# Altium PCB 20bit_40MS_ADC_DIOT.PcbDoc (part 7 of 8)
Units mm, origin at the board's own origin, x right, y up, seen from the top; angles counter-clockwise.
Board outline 222.63 x 100.1 mm, 6 copper layers (L1, L2, L3, L4, L5, L6), stack 2.522 mm thick; 616 components, 374 nets, 2097 pads, 984 vias.
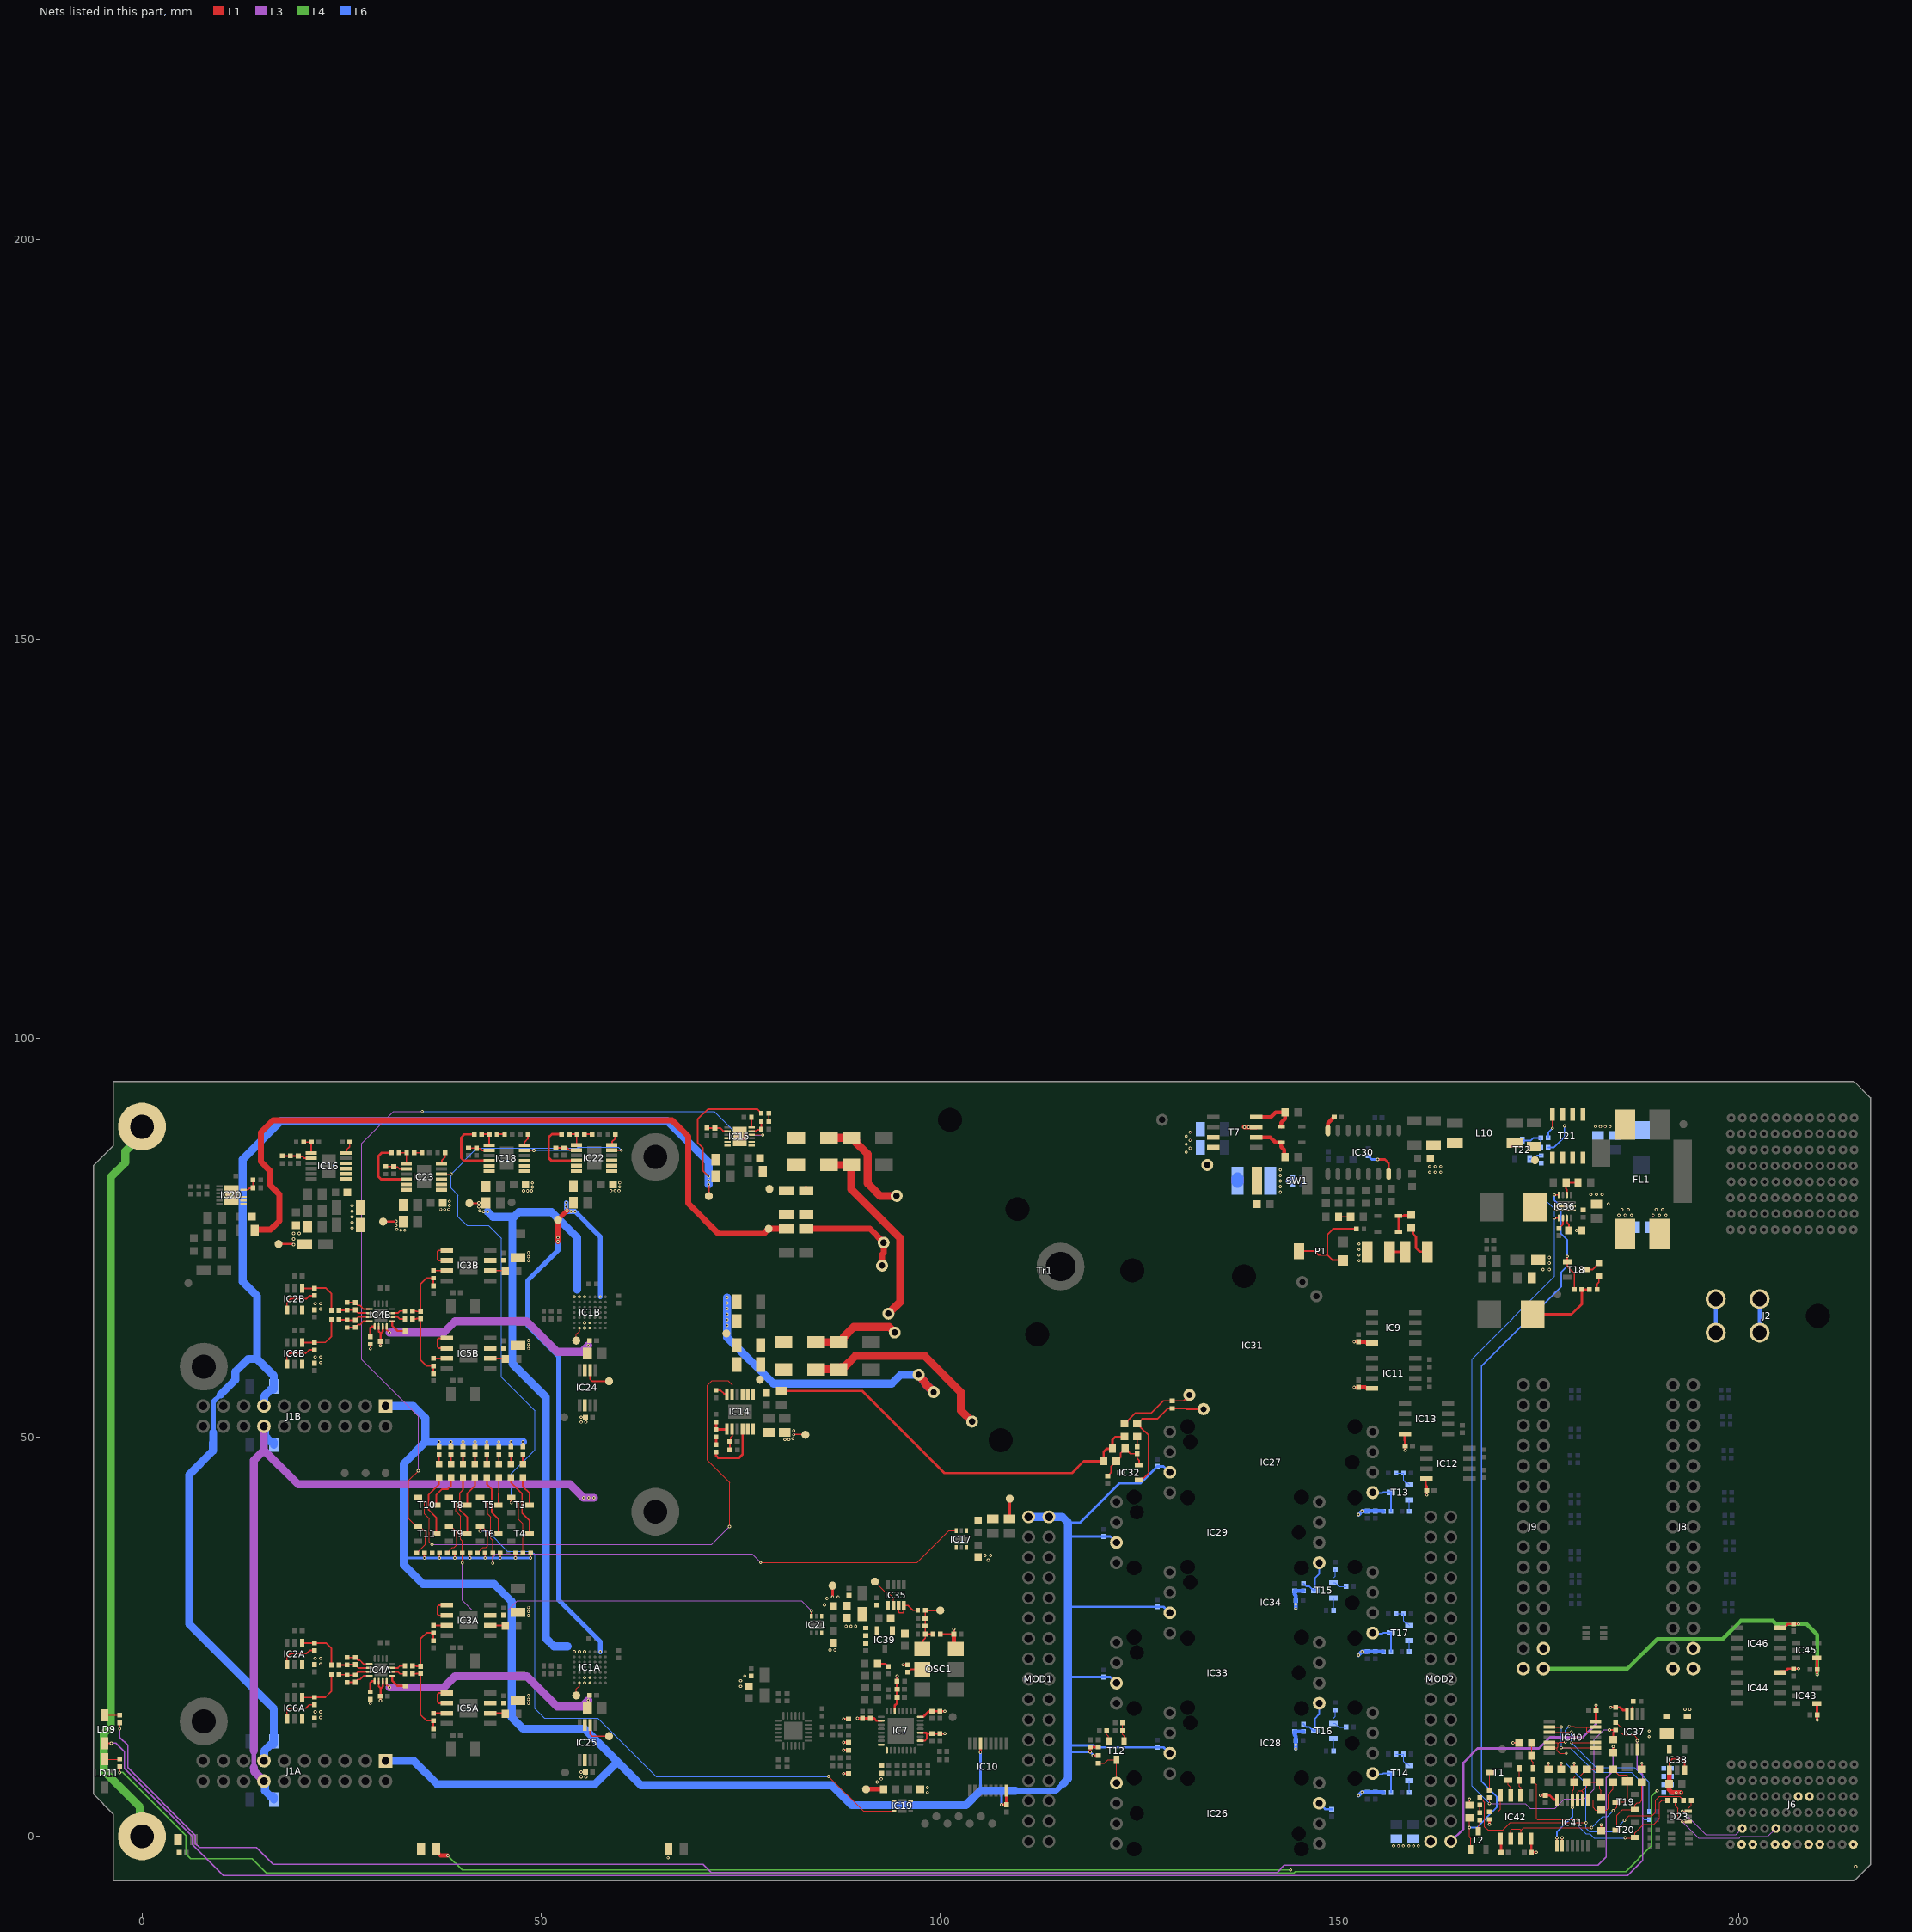
[diagram p9: the nets of this part, all layers, seen from the top]

## Via types
v1: diameter 0.4, hole 0.2, L1 to L6, tented both sides, 984 vias

## Nets (pads, with @x,y where several pads share a name; then routed paths per layer and width w, separated by ;. In a path a pad name is that pad's centre, name@x,y a point inside that pad or via, vN(x,y) a via of type N, cw(c..) or ccw(c..) an arc to the next point about the centre after c; other vN are vias at no path point) (continued)
N6V0: B17.1 C92.2 C93.2 C94.1 C95.1 C102.2 C103.2 IC20.1 IC20.2 IC20.3 IC20.13 Tr1.8 Tr1.9 | length 106.6
  L1 w0.75: C102.2@14.1,75.925 14.175,76 16.1,76 17.2,77.1 17.2,80.4 16.05,81.55 16.05,83.35 14.9,84.5 14.9,88.2 16.4,89.7 66.4,89.7 68.4,87.7 68.4,79.3 72.2,75.5 77.9,75.5 B17.1@78.5,76.1 C94.1@80.7,76.1 ; C95.1@83.2,76.1 91.178,76.1 Tr1.8@92.909,74.369 92.9,74.361 92.9,73.1 92.708,72.908 Tr1.9@92.708,71.494
  L1 w1: C94.1@80.625,76.175 C94.1@80.7,76.1
N15V0: B18.1 C68.2 C69.2 C184A.1 C184B.1 IC15.10 IC15.11 IC15.12 J1A.13 J1B.13 R197.2 | length 176
  L1 w0.2: v1(70.968,81.675) 71,81.643 B18.1@71,80.2 ; v1(70.968,82.675) 70.284,83.359 70.284,86.238 69.6,86.922 69.6,89.8 70.9,91.1 77.053,91.1 77.368,90.785 77.388,90.785 77.578,90.595 R197.2@77.578,90.575
  L6 w0.64: 8.922,50.588 8.922,54.434 9.666,55.178 9.678,55.178 9.858,55.358
  L6 w1: 8.922,50.588 8.922,49.322 8.9,49.3 8.9,48.3 5.9,45.3 5.9,26.6 16.5,16 C184A.1@16.5,11.9 16.5,11.575 16.425,11.5 16.1,11.5 15.327,10.727 15.327,9.513 J1A.13@15.272,9.458 ; 9.858,55.358 11.7,57.2 11.7,58.2 13.3,59.8 14.4,59.8 ; J1B.13@15.272,53.908 15.327,53.963 15.327,55.177 16.1,55.95 16.425,55.95 16.5,56.025 C184B.1@16.5,56.35 16.5,57.7 14.4,59.8 ; v1(70.968,81.675) v1(70.968,82.175) v1(70.968,82.675) 70.968,84.432 65.8,89.6 17.4,89.6 12.6,84.8 12.6,69.5 14.4,67.7 14.4,59.8
N15V0_LNA_ILIM: IC15.6 R34.2 | length 1.3
  L1 w0.2: R34.2@76.338,90.075 76.368,90.045 IC15.6@76.368,88.8
N15V0_LNA_PG: IC15.4 R70.1 T11.1 | length 110.9
  L1 w0.125: R70.1@34.43,35.5 34.43,35.52 34.657,35.748 34.677,35.748 35.5,36.57 35.5,38.1 35.013,38.588 34.812,38.588 T11.1@34.55,38.85 34.35,38.85 33.4,39.8 33.4,44.6 v1(34.6,45.8) ; IC15.4@76.368,87.9 77.718,87.9 v1(77.768,87.85)
  L3 w0.125: v1(34.6,45.8) 34.6,52.6 27.5,59.7 27.5,86.8 31.5,90.8 v1(35.1,90.8)
  L6 w0.125: v1(35.1,90.8) 71.7,90.8 74.65,87.85 v1(77.768,87.85)
N15V0_LNA_SET: C70.2 IC15.8 R35.2 | length 2.8
  L1 w0.2: R35.2@70.768,88.745 70.788,88.725 C70.2@71.768,88.725 72.418,88.725 72.793,88.35 IC15.8@73.368,88.35
N18V0: B16.1 C66.2 C67.2 C92.1 C93.1 D13.2 D14.2 IC15.1 IC15.2 IC15.13 | length 0.1
  L1 w1: C66.2@77.768,83.275 77.768,83.32 C66.2@77.793,83.345 ; C93.1@83.168,80.932 C93.1@83.2,80.9
NetB1A_1: B1A.1 IC1A.G2 | length 1.7
  L1 w0.125: B1A.1@54.4,17.65 54.4,18.45 54.8,18.85 IC1A.G2@54.8,19.225
NetB1B_1: B1B.1 IC1B.G2 | length 1.7
  L1 w0.125: B1B.1@54.4,62.1 54.4,62.9 54.8,63.3 IC1B.G2@54.8,63.675
NetB5_1: B5.1 C82.2 C154.2 OSC1.1 R123.1 R125.2 R126.2 | length 7.9
  L1 w0.2: OSC1.1@97.75,23.465 97.848,23.563 97.848,24.548 98.12,24.82 R126.2@98.12,25.325 ; R123.1@99.08,25.325 R126.2@98.12,25.325 ; B5.1@100,28.3 98.145,28.3 R125.2@98.12,28.325 R126.2@98.12,25.325
NetB15_1: B15.1 C167.2 L10.1 T21.5 T21.6 T21.7 T21.8
NetC9A_1: C9A.1 IC4A.2 R7A.2 R10A.1 | length 4
  L1 w0.2: R7A.2@24.67,21.45 25.67,21.45 R10A.1@25.7,21.48 25.72,21.5 C9A.1@26.7,21.5 27.1,21.1 IC4A.2@28.475,21.1
NetC9A_2: C9A.2 IC4A.1 R10A.2 | length 3.1
  L1 w0.2: R10A.2@25.7,22.42 25.72,22.4 C9A.2@26.7,22.4 27.05,22.05 27.3,22.05 27.75,21.6 IC4A.1@28.475,21.6
NetC9B_1: C9B.1 IC4B.2 R7B.2 R10B.1 | length 4
  L1 w0.2: R7B.2@24.67,65.9 25.67,65.9 R10B.1@25.7,65.93 25.72,65.95 C9B.1@26.7,65.95 27.1,65.55 IC4B.2@28.475,65.55
NetC9B_2: C9B.2 IC4B.1 R10B.2 | length 3.1
  L1 w0.2: R10B.2@25.7,66.87 25.72,66.85 C9B.2@26.7,66.85 27.05,66.5 27.3,66.5 27.75,66.05 IC4B.1@28.475,66.05
NetC11A_2: C11A.2 C15A.2 R9A.1 R12A.2 | length 7.4
  L1 w0.2: R12A.2@33.87,21.35 34.3,21.35 34.35,21.3 C15A.2@34.9,21.3 34.9,24.75 35.63,25.48 36.471,25.48 C11A.2@36.471,24.5
NetC11B_2: C11B.2 C15B.2 R9B.1 R12B.2 | length 7.4
  L1 w0.2: R12B.2@33.87,65.8 34.3,65.8 34.35,65.75 C15B.2@34.9,65.75 34.9,69.2 35.63,69.93 36.471,69.93 C11B.2@36.471,68.95
NetC15A_1: C15A.1 C22A.2 R13A.2 R17A.1 | length 9.1
  L1 w0.2: R13A.2@33.87,20.35 34.3,20.35 34.35,20.4 C15A.1@34.9,20.4 34.9,15.21 35.63,14.48 36.471,14.48 C22A.2@36.471,13.5
NetC15B_1: C15B.1 C22B.2 R13B.2 R17B.1 | length 9.1
  L1 w0.2: R13B.2@33.87,64.8 34.3,64.8 34.35,64.85 C15B.1@34.9,64.85 34.9,59.66 35.63,58.93 36.471,58.93 C22B.2@36.471,57.95
NetC19A_2: C19A.2 IC4A.9 | length 2.6
  L1 w0.25: IC4A.9@31.325,20.1 31.325,19.525 32,18.85 C19A.2@33.05,18.85
NetC19B_2: C19B.2 IC4B.9 | length 2.6
  L1 w0.25: IC4B.9@31.325,64.55 31.325,63.975 32,63.3 C19B.2@33.05,63.3
NetC20A_1: C20A.1 IC4A.3 R15A.2 R18A.1 | length 4
  L1 w0.2: R15A.2@24.67,20.25 25.67,20.25 R18A.1@25.7,20.22 25.72,20.2 C20A.1@26.7,20.2 27.1,20.6 IC4A.3@28.475,20.6
NetC20A_2: C20A.2 IC4A.4 R18A.2 | length 3.1
  L1 w0.2: R18A.2@25.7,19.28 25.72,19.3 C20A.2@26.7,19.3 27.05,19.65 27.3,19.65 27.75,20.1 IC4A.4@28.475,20.1
NetC20B_1: C20B.1 IC4B.3 R15B.2 R18B.1 | length 4
  L1 w0.2: R15B.2@24.67,64.7 25.67,64.7 R18B.1@25.7,64.67 25.72,64.65 C20B.1@26.7,64.65 27.1,65.05 IC4B.3@28.475,65.05
NetC20B_2: C20B.2 IC4B.4 R18B.2 | length 3.1
  L1 w0.2: R18B.2@25.7,63.73 25.72,63.75 C20B.2@26.7,63.75 27.05,64.1 27.3,64.1 27.75,64.55 IC4B.4@28.475,64.55
NetC47_2: C47.2 R22.1 | length 1.4
  L1 w0.2: R22.1@92.15,21.625 93.1,21.625 C47.2@93.45,21.275
NetC132_2: C132.2 IC30.16 | length 2
  L1 w0.5: IC30.16@148.555,88.425 148.57,88.44 148.57,89.32 C132.2@149.35,90.1
NetC137_1: C137.1 R104.1 R105.2 SW1.2 T7.3 | length 1.5
  L1 w0.6: v1(138.105,88.835) T7.3@139.6,88.835
  other v1: 142.6,80.7 142.6,81.4 142.6,82.1 142.6,82.8 142.6,83.5 138.653,88.835
NetC137_2: C137.2 C140.2 Tr1.2 | length 0.4
  L6 w1.5: C137.2@137.25,82 C137.2@137.25,82.1 C137.2@137.25,82.427
  other v1: 152.45,72.1 152.45,72.8 152.45,73.5 152.45,74.2
NetC138_1: C138.1 R110.2 | length 1.5
  L1 w0.2: R110.2@149.9,77.6 C138.1@151.4,77.6
NetC139_1: C139.1 R109.1 | length 4.4
  L1 w0.3: R109.1@159,76.2 159.224,75.976 159.224,75.476 159.6,75.1 159.6,73.7 160.051,73.249 160.951,73.249 C139.1@161,73.2
NetC139_2: C139.2 C140.1 | length 1.9
  L1 w0.3: C140.1@156.3,73.2 C139.2@158.2,73.2
NetC145_1: C145.1 C146.1 IC32.2 R116.1 R118.2 | length 7.6
  L1 w0.2: R118.2@120.968,45.145 120.988,45.145 121.178,45.335 121.178,45.355 121.4,45.577 121.4,46.307 121.668,46.575 121.693,46.575 122.068,46.95 C146.1@122.068,46.975 ; C146.1@122.068,47 122.443,47.375 122.468,47.375 122.6,47.507 122.6,48.007 122.768,48.175 122.818,48.175 R116.1@123.168,48.525 ; R116.1@123.168,48.575 R116.1@123.168,48.525 ; IC32.2@124.918,46.525 124.918,47.082 124.668,47.332 C145.1@124.668,47.925 123.818,47.925 123.568,48.175 123.518,48.175 R116.1@123.168,48.525
NetC145_2: C145.2 R117.1 | length 1.3
  L1 w0.2: C145.2@124.668,48.825 R117.1@124.668,50.075
NetC166_2: C166.2 IC36.9 | length 1.5
  L1 w0.2: C166.2@177.5,76.15 178,76.65 IC36.9@178,77.45
NetC172_1: C172.1 FL1.3 J2.1 J2.2 | length 4.6
  L6 w0.5: J2.2@202.645,63.089 J2.1@202.645,67.721
  other v1: 189.3,77.8 190.1,77.8 190.9,77.8 189.7,78.5 190.5,78.5
NetC172_2: C172.2 FL1.1 J2.3 J2.4 | length 4.4
  L6 w0.5: J2.4@197.145,63.089 J2.3@197.145,67.289 J2.3@197.27,67.415
  other v1: 185,77.8 185.8,77.8 186.6,77.8 185.4,78.5 186.2,78.5
NetC179_2: C179.2 IC42.6 IC42.7 R183.2 T19.3 | length 23.9
  L1 w0.125: IC42.6@171.465,-0.3 171.465,0.765 171.6,0.9 172.6,0.9 172.735,0.765 ; IC42.7@172.735,-0.3 172.735,0.765 ; v1(181.6,1.1) 173.07,1.1 172.735,0.765 ; v1(184.3,3.2) 184.75,3.65 T19.3@184.75,4.3 185.7,4.3 186.1,4.7 C179.2@186.1,6.9 186.1,7.6 186,7.7 185,7.7 184.737,7.963 184.737,8.013 184.35,8.4 R183.2@184.3,8.4
  L6 w0.125: v1(181.6,1.1) 183,2.5 183.6,2.5 v1(184.3,3.2)
NetC181_2: C181.2 IC42.5 | length 1.7
  L1 w0.3: IC42.5@170.195,-0.3 170.25,-0.355 C181.2@170.25,-2
NetC182_2: C182.2 D26.1 R185.2 | length 3.3
  L1 w0.125: R185.2@174.1,11.7 C182.2@174.1,10.1 174.1,9.4 174.25,9.25 D26.1@174.25,8.5
NetD1_2: D1.2 R100.2 T7.2 | length 5.4
  L1 w0.5: T7.2@139.6,87.565 141.335,87.565 142,86.9 D1.2@142.7,86.9 142.7,86.4 143.095,86.005 143.095,85.205 R100.2@143.2,85.1
NetD2_2: D2.2 D5.1 Tr1.3 | length 11.1
  L1 w1: D2.2@84.45,61.9 D5.1@87.25,61.9 87.575,61.9 87.85,62.175 87.85,62.5 89.15,63.8 93.6,63.8 Tr1.3@94.291,63.109
NetD3_2: D3.2 D6.1 Tr1.6 | length 25
  L1 w1: D3.2@84.45,58.5 D6.1@87.25,58.5 87.525,58.775 87.975,58.775 89.4,60.2 98,60.2 102.6,55.6 102.6,53.342 Tr1.6@103.991,51.951
NetD4_2: D4.2 R103.2 T7.4 | length 5.9
  L1 w0.5: T7.4@139.6,90.105 141.405,90.105 142,90.7 R103.2@143.2,90.7 143.2,89.9 142.7,89.4 D4.2@142.7,88.9
NetD7_2: D7.2 D8.1 R109.2 | length 3.6
  L1 w0.3: D8.1@157.4,75.7 D7.2@157.4,77.7 158,77.7 158.1,77.8 R109.2@159,77.8
NetD13_1: D13.1 D15.2 Tr1.7 | length 14.5
  L1 w1: D13.1@86.65,87.225 86.375,87.5 D13.1@86.05,87.5 D15.2@88.85,87.5 89.175,87.5 89.45,87.225 89.45,86.9 90.9,85.45 90.9,81.8 92.478,80.222 Tr1.7@94.532,80.222
NetD14_1: D14.1 D16.2 Tr1.10 | length 24.6
  L1 w1: D14.1@86.05,84.1 D16.2@88.85,84.1 88.85,81.05 95,74.9 95,66.973 Tr1.10@93.5,65.473
NetD23_4: D23.4 J6.H2 R133.2 | length 16.9
  L1 w0.125: R133.2@192.07,4.5 192.07,3.83 192.4,3.5 192.4,2.4 v1(192.95,1.85) D23.4@193.8,1.85
  L3 w0.125: v1(192.95,1.85) 195,-0.2 200.1,-0.2 200.3,0 203.695,0 J6.H2@204.683,0.988
NetD23_6: D23.6 J6.K2 R138.2 | length 11.3
  L1 w0.125: v1(192.95,3.15) D23.6@193.7,3.15 193.7,3.5 194.07,3.87 R138.2@194.07,4.5
  L3 w0.125: v1(192.95,3.15) 195.9,0.2 199.695,0.2 J6.K2@200.483,0.988
NetD25_2: D25.2 D26.2 IC42.2 | length 3.5
  L1 w0.125: D26.2@172.55,8.5 D25.2@172.55,7 172.55,6.25 172.735,6.065 IC42.2@172.735,5.1
NetIC2A_1: IC2A.1 R7A.1 R11A.2 | length 6
  L1 w0.2: IC2A.1@20.05,24.2 21.58,24.2 R11A.2@21.6,24.22 23.03,24.22 23.73,23.52 R7A.1@23.73,21.45
NetIC2A_4: IC2A.4 R11A.1 | length 4.8
  L1 w0.2: IC2A.4@18.15,21.5 18.15,22.451 18.586,22.887 20.586,22.887 20.979,23.28 R11A.1@21.649,23.28
NetIC2B_1: IC2B.1 R7B.1 R11B.2 | length 6
  L1 w0.2: IC2B.1@20.05,68.65 21.58,68.65 R11B.2@21.6,68.67 23.03,68.67 23.73,67.97 R7B.1@23.73,65.9
NetIC2B_4: IC2B.4 R11B.1 | length 4.8
  L1 w0.2: IC2B.4@18.15,65.95 18.15,66.901 18.586,67.337 20.586,67.337 20.979,67.73 R11B.1@21.649,67.73
NetIC3A_1: IC3A.1 IC3A.2 | length 3.5
  L1 w0.2: IC3A.2@38.2,27.685 37.173,27.685 37,27.858 37,28.782 37.173,28.955 IC3A.1@38.2,28.955
NetIC3A_3: IC3A.3 R9A.2 | length 1.7
  L1 w0.2: R9A.2@36.471,26.428 36.484,26.415 IC3A.3@38.2,26.415
NetIC3A_6: IC3A.6 R8A.1 | length 1.9
  L1 w0.2: IC3A.6@43.6,26.415 45.414,26.415 R8A.1@45.471,26.358
NetIC3B_1: IC3B.1 IC3B.2 | length 3.5
  L1 w0.2: IC3B.2@38.2,72.135 37.173,72.135 37,72.308 37,73.232 37.173,73.405 IC3B.1@38.2,73.405
NetIC3B_3: IC3B.3 R9B.2 | length 1.7
  L1 w0.2: R9B.2@36.471,70.878 36.484,70.865 IC3B.3@38.2,70.865
NetIC3B_6: IC3B.6 R8B.1 | length 1.9
  L1 w0.2: IC3B.6@43.6,70.865 45.414,70.865 R8B.1@45.471,70.808
NetIC4A_5: IC4A.5 R14A.1 | length 1.7
  L1 w0.25: R14A.1@28.6,18.12 28.6,19.25 28.775,19.425 IC4A.5@29.05,19.425
NetIC4A_10: IC4A.10 R13A.1 | length 1.8
  L1 w0.2: IC4A.10@31.325,20.6 32.05,20.6 32.3,20.35 R13A.1@33.03,20.35
NetIC4A_11: IC4A.11 R12A.1 | length 1.8
  L1 w0.2: IC4A.11@31.325,21.1 32.05,21.1 32.3,21.35 R12A.1@33.03,21.35
NetIC4B_5: IC4B.5 R14B.1 | length 1.7
  L1 w0.25: R14B.1@28.6,62.57 28.6,63.7 28.775,63.875 IC4B.5@29.05,63.875
NetIC4B_10: IC4B.10 R13B.1 | length 1.8
  L1 w0.2: IC4B.10@31.325,65.05 32.05,65.05 32.3,64.8 R13B.1@33.03,64.8
NetIC4B_11: IC4B.11 R12B.1 | length 1.8
  L1 w0.2: IC4B.11@31.325,65.55 32.05,65.55 32.3,65.8 R12B.1@33.03,65.8
NetIC5A_1: IC5A.1 IC5A.2 | length 3.5
  L1 w0.2: IC5A.2@38.2,16.685 37.173,16.685 37,16.858 37,17.782 37.173,17.955 IC5A.1@38.2,17.955
NetIC5A_3: IC5A.3 R17A.2 | length 1.7
  L1 w0.2: R17A.2@36.471,15.428 36.484,15.415 IC5A.3@38.2,15.415
NetIC5A_6: IC5A.6 R16A.1 | length 1.9
  L1 w0.2: IC5A.6@43.6,15.415 45.414,15.415 R16A.1@45.471,15.358
NetIC5B_1: IC5B.1 IC5B.2 | length 3.5
  L1 w0.2: IC5B.2@38.2,61.135 37.173,61.135 37,61.308 37,62.232 37.173,62.405 IC5B.1@38.2,62.405
NetIC5B_3: IC5B.3 R17B.2 | length 1.7
  L1 w0.2: R17B.2@36.471,59.878 36.484,59.865 IC5B.3@38.2,59.865
NetIC5B_6: IC5B.6 R16B.1 | length 1.9
  L1 w0.2: IC5B.6@43.6,59.865 45.414,59.865 R16B.1@45.471,59.808
NetIC6A_1: IC6A.1 R15A.1 R19A.2 | length 6.1
  L1 w0.2: IC6A.1@20.05,17.4 21.58,17.4 R19A.2@21.6,17.42 22.97,17.42 23.73,18.18 R15A.1@23.73,20.25
NetIC6A_4: IC6A.4 R19A.1 | length 4.8
  L1 w0.2: IC6A.4@18.15,14.7 18.15,15.7 18.5,16.05 20.5,16.05 20.93,16.48 R19A.1@21.6,16.48
NetIC6B_1: IC6B.1 R15B.1 R19B.2 | length 6.1
  L1 w0.2: IC6B.1@20.05,61.85 21.58,61.85 R19B.2@21.6,61.87 22.97,61.87 23.73,62.63 R15B.1@23.73,64.7
NetIC6B_4: IC6B.4 R19B.1 | length 4.8
  L1 w0.2: IC6B.4@18.15,59.15 18.15,60.15 18.5,60.5 20.5,60.5 20.93,60.93 R19B.1@21.6,60.93
NetIC15_5: IC15.5 R198.1 R199.1 | length 2.3
  L1 w0.2: IC15.5@76.368,88.35 76.943,88.35 77.105,88.512 77.515,88.512 R199.1@77.578,88.575 R198.1@77.578,89.575
NetIC20_5: IC20.5 R45.1 R46.1 | length 2.3
  L1 w0.2: IC20.5@12.7,81 13.275,81 13.437,81.162 13.847,81.162 R46.1@13.91,81.225 R45.1@13.91,82.225
NetIC26_1: IC26.1 R79.1 T12.3 | length 5.4
  L1 w0.125: R79.1@119.782,9.168 120.568,9.168 121,9.6 122.07,9.6 T12.3@122.082,9.588 122.068,9.574 IC26.1@122.068,6.685
NetIC27_1: IC27.1 R80.1 T13.3 | length 4.8
  L6 w0.2: IC27.1@154.168,43.065 154.233,43 155.4,43 155.5,43.1 156.45,43.1 T13.3@156.47,43.08 R80.1@156.47,40.7
NetIC28_1: IC28.1 R87.1 T14.3 | length 4.8
  L6 w0.2: IC28.1@154.168,7.865 154.233,7.8 155.4,7.8 155.5,7.9 T14.3@156.45,7.9 156.47,7.88 R87.1@156.47,5.5
NetIC29_1: IC29.1 R88.1 T15.3 | length 5.5
  L6 w0.2: R88.1@145.5,31.67 145.52,31.67 145.747,31.443 145.747,31.423 145.87,31.3 146.25,31.3 146.75,30.8 T15.3@146.95,30.8 146.95,32.35 147.468,32.868 IC29.1@147.468,34.265
NetIC30_7: IC30.7 R102.2 | length 4.3
  L1 w0.3: v1(154.8,84.8) 155.7,84.8 156.175,84.325 IC30.7@156.175,82.975
  L6 w0.3: R102.2@153.6,85.23 153.62,85.23 153.76,85.09 153.76,85.07 154.03,84.8 v1(154.8,84.8)
NetIC31_1: IC31.1 R114.2 R115.2 | length 9.7
  L1 w0.2: R114.2@123.068,51.675 123.118,51.675 123.468,52.025 123.468,52.075 124.393,53 126.4,53 127.945,54.545 R115.2@129.068,54.545 130.47,54.545 IC31.1@131.213,55.288
NetIC31_2: IC31.2 IC32.1 R115.1 R117.2 | length 17.5
  L1 w0.2: R117.2@124.668,51.675 R117.2@124.718,51.675 ; IC32.1@124.918,44.625 125.118,44.825 125.425,44.825 126.117,45.517 126.117,45.683 126.1,45.7 126.1,50.243 125.068,51.275 125.068,51.325 R117.2@124.718,51.675 ; IC31.2@132.981,53.52 132.961,53.5 130.9,53.5 130.795,53.605 R115.1@129.068,53.605 128.505,53.605 127.2,52.3 125.293,52.3 125.068,52.075 125.068,52.025 R117.2@124.718,51.675
NetIC33_1: IC33.1 R95.1 T16.3 | length 5.5
  L6 w0.2: R95.1@145.5,14.07 145.52,14.07 145.747,13.843 145.747,13.823 145.87,13.7 146.25,13.7 146.75,13.2 T16.3@146.95,13.2 146.95,14.75 147.468,15.268 IC33.1@147.468,16.665
NetIC34_1: IC34.1 R96.1 T17.3 | length 4.8
  L6 w0.2: IC34.1@154.168,25.465 154.233,25.4 155.4,25.4 155.5,25.5 156.45,25.5 T17.3@156.47,25.48 R96.1@156.47,23.1
NetIC35_3: IC35.3 IC35.4 R125.1 | length 4.4
  L1 w0.2: IC35.3@94.775,28.925 94.775,28.125 94.9,28 95.3,28 95.425,28.125 IC35.4@95.425,28.925 95.975,28.925 96.575,28.325 R125.1@97.18,28.325
NetIC36_2: IC36.2 L1.1
NetIC36_5: IC36.5 R127.1 R129.2 | length 3.1
  L1 w0.2: IC36.5@178.5,80.35 178.5,81 178.4,81.1 R127.1@178.4,81.9 R129.2@179.9,81.9
NetIC36_10: IC36.10 R128.2 | length 1.7
  L1 w0.2: IC36.10@178.5,77.45 178.5,76.9 178.75,76.65 R128.2@178.75,75.9
NetIC37_3: IC37.3 LD9.1 R135.1 | length 222.7
  L1 w0.125: R135.1@184.6,14.27 184.827,14.043 184.857,14.043 185.3,13.6 185.3,13 185.6,12.7 186.9,12.7 187.325,12.275 v1(187.325,11.975) IC37.3@187.325,10.9
  L1 w0.2: LD9.1@-4.721,11.661 v1(-3.861,11.661)
  L3 w0.15: v1(-3.861,11.661) -3.261,11.661 -2.2,10.6 -2.2,8.5 6.3,0 6.3,-1 10.2,-4.9 186.1,-4.9 188,-3 188,7.74 187.325,8.415 v1(187.325,11.975)
NetIC37_7: IC37.7 R137.2 | length 1.7
  L1 w0.125: IC37.7@186.675,15.3 186.675,16.175 186.83,16.33 R137.2@186.83,16.9
NetIC41_1: IC41.1 IC41.11 R37.1 R160.1 R166.1 | length 13.1
  L1 w0.125: IC41.11@179.2,4.6 179.2,5.7 179.4,5.9 R160.1@179.4,6.8 179.4,7.4 179.6,7.6 180.2,7.6 180.562,7.963 180.562,8.013 180.95,8.4 R166.1@181,8.4 R37.1@182.6,8.4
  L1 w0.2: IC41.1@177.25,-1.2 v1(177.25,-0.2) ; v1(179.2,3.6) IC41.11@179.2,4.6
  L6 w0.2: v1(177.25,-0.2) 177.25,0.55 179.2,2.5 v1(179.2,3.6)
NetIC41_8: IC41.8 R179.1 R183.1 | length 7.2
  L1 w0.125: IC41.8@181.15,4.6 181.7,4.6 181.8,4.5 181.8,3.6 182.1,3.3 R179.1@182.8,3.3 183.5,3.3 183.7,3.5 183.7,5.3 184.3,5.9 R183.1@184.3,6.8
NetIC41_9: IC41.9 IC41.10 R37.2 R166.2 R179.2 | length 7.7
  L1 w0.125: IC41.10@179.85,4.6 179.85,5.55 180,5.7 180.35,5.7 ; IC41.9@180.5,4.6 180.5,5.55 180.35,5.7 ; R179.2@182.8,4.9 182.8,5.7 182.6,5.9 R37.2@182.6,6.8 R166.2@181,6.8 181,6.2 180.8,6 180.65,6 180.35,5.7
NetIC42_4: IC42.4 R181.2 | length 3.2
  L1 w0.125: R181.2@168.8,3.07 169.87,3.07 170.195,3.395 IC42.4@170.195,5.1
NetLD1_1: LD1.1 T3.3 | length 3.8
  L1 w0.2: LD1.1@47.7,44.975 47.7,43.8 48.55,42.95 T3.3@48.55,41.5
NetLD1_2: LD1.2 R49.1 | length 1.2
  L1 w0.2: LD1.2@47.7,46.625 R49.1@47.7,47.83
NetLD2_1: LD2.1 T4.3 | length 8
  L1 w0.2: LD2.1@46.2,44.975 46.2,44.3 47.6,42.9 47.6,40.5 48.55,39.55 T4.3@48.55,37.9
NetLD2_2: LD2.2 R50.1 | length 1.2
  L1 w0.2: LD2.2@46.2,46.625 R50.1@46.2,47.83
NetLD3_1: LD3.1 T5.3 | length 3.5
  L1 w0.2: T5.3@44.65,41.5 44.65,42.95 44.7,43 LD3.1@44.7,44.975
NetLD3_2: LD3.2 R51.1 | length 1.2
  L1 w0.2: LD3.2@44.7,46.625 R51.1@44.7,47.83
NetLD4_1: LD4.1 T6.3 | length 7.7
  L1 w0.2: LD4.1@43.2,44.975 43.2,44.1 43.8,43.5 43.8,40.6 44.65,39.75 T6.3@44.65,37.9
NetLD4_2: LD4.2 R52.1 | length 1.2
  L1 w0.2: LD4.2@43.2,46.625 R52.1@43.2,47.83
NetLD5_1: LD5.1 T8.3 | length 3.9
  L1 w0.2: T8.3@40.75,41.5 40.75,42.95 41.7,43.9 LD5.1@41.7,44.975
NetLD5_2: LD5.2 R61.1 | length 1.2
  L1 w0.2: LD5.2@41.7,46.625 R61.1@41.7,47.83
NetLD6_1: LD6.1 T9.3 | length 7.6
  L1 w0.2: LD6.1@40.2,44.975 40.2,43.4 39.8,43 39.8,40.9 40.75,39.95 T9.3@40.75,37.9
NetLD6_2: LD6.2 R62.1 | length 1.2
  L1 w0.2: LD6.2@40.2,46.625 R62.1@40.2,47.83
NetLD7_1: LD7.1 T10.3 | length 4.7
  L1 w0.2: T10.3@36.85,41.5 36.85,42.75 37.6,43.5 38.3,43.5 38.7,43.9 LD7.1@38.7,44.975
NetLD7_2: LD7.2 R63.1 | length 1.2
  L1 w0.2: LD7.2@38.7,46.625 R63.1@38.7,47.83
NetLD8_1: LD8.1 T11.3 | length 8
  L1 w0.2: T11.3@36.85,37.9 36.85,39.95 35.9,40.9 35.9,42.8 37.2,44.1 LD8.1@37.2,44.975
NetLD8_2: LD8.2 R64.1 | length 1.2
  L1 w0.2: LD8.2@37.2,46.625 R64.1@37.2,47.83
NetLD9_2: LD9.2 R132.1 | length 1.9
  L1 w0.125: LD9.2@-4.721,15.161 -2.809,15.161 R132.1@-2.8,15.17
NetLD10_1: LD10.1 T18.3 | length 2
  L1 w0.2: T18.3@180.85,71 181.675,71 LD10.1@182.5,71.825
NetLD10_2: LD10.2 R139.1 | length 1.8
  L1 w0.2: R139.1@182.27,68.5 182.27,69.17 182.5,69.4 LD10.2@182.5,70.175
NetLD11_2: LD11.2 R141.1 | length 1.9
  L1 w0.125: LD11.2@-4.721,9.649 -2.821,9.649 R141.1@-2.8,9.67
NetOSC1_2: OSC1.2 R124.2 | length 2
  L1 w0.2: R124.2@95.95,20.555 95.97,20.555 96.16,20.745 96.16,20.765 96.32,20.925 OSC1.2@97.75,20.925
NetP1_2: P1.2 P1.3 R108.1 | length 12.5
  L1 w0.2: P1.2@144.95,73.3 146.9,73.3 147.4,72.8 148.5,72.8 ; P1.3@150.45,72.15 150.4,72.2 149.1,72.2 148.5,72.8 ; R108.1@152.13,76.1 149.2,76.1 148.5,75.4 148.5,72.8
NetR48_1: R48.1 R53.2 | length 1
  L1 w0.2: R48.1@44.463,87.95 R53.2@45.423,87.95
NetR73_1: R73.1 R75.2 | length 1
  L1 w0.2: R73.1@55.413,87.975 R75.2@56.373,87.975
NetR77_1: R77.1 R78.2 | length 1
  L1 w0.2: R77.1@34.088,85.625 R78.2@35.048,85.625
NetR81_1: R81.1 R83.2 T12.1 | length 2.4
  L1 w0.125: R81.1@122.852,14.238 122.852,12.748 123.032,12.568 T12.1@123.032,11.888
NetR82_1: R82.1 R86.2 T13.1 | length 2.8
  L6 w0.125: R86.2@157.07,45.5 R82.1@158.03,45.5 158.03,44.57 158.287,44.312 158.488,44.312 T13.1@158.75,44.05
NetR84_2: R84.2 T12.2 | length 1.5
  L1 w0.125: R84.2@120.852,13.238 120.852,12.748 121.073,12.527 121.073,11.948 T12.2@121.132,11.888
NetR85_2: R85.2 T13.2 | length 1.5
  L6 w0.125: T13.2@158.75,42.15 158.75,40.72 R85.2@158.77,40.7
NetR89_1: R89.1 R92.2 T14.1 | length 2.8
  L6 w0.125: R92.2@157.07,10.3 R89.1@158.03,10.3 158.03,9.37 158.287,9.112 158.488,9.112 T14.1@158.75,8.85
NetR90_1: R90.1 R94.2 T15.1 | length 3.5
  L6 w0.125: R90.1@149.5,33.43 149.5,32.6 149.25,32.35 T15.1@149.25,31.75 149.45,31.75 149.9,31.3 R94.2@150.83,31.3
NetR91_2: R91.2 T14.2 | length 1.5
  L6 w0.125: T14.2@158.75,6.95 158.75,5.52 R91.2@158.77,5.5
NetR93_2: R93.2 T15.2 | length 1.6
  L6 w0.125: T15.2@149.25,29.85 149.27,29.83 R93.2@149.27,28.3
NetR97_1: R97.1 R119.2 T16.1 | length 3.5
  L6 w0.125: R97.1@149.5,15.83 149.5,15 149.25,14.75 T16.1@149.25,14.15 149.45,14.15 149.9,13.7 R119.2@150.83,13.7
NetR98_1: R98.1 R121.2 T17.1 | length 2.8
  L6 w0.125: R121.2@157.07,27.9 R98.1@158.03,27.9 158.03,26.97 158.287,26.712 158.488,26.712 T17.1@158.75,26.45
NetR99_2: R99.2 T16.2 | length 1.6
  L6 w0.125: T16.2@149.25,12.25 149.27,12.23 R99.2@149.27,10.7
NetR120_2: R120.2 T17.2 | length 1.5
  L6 w0.125: T17.2@158.75,24.55 R120.2@158.75,23.12 R120.2@158.77,23.1
NetR153_1: R153.1 R154.2 | length 1
  L1 w0.125: R154.2@167.6,2.97 R153.1@167.6,3.93
NetR154_1: R154.1 T2.3 | length 1.5
  L1 w0.125: T2.3@167.4,0.65 167.4,1.3 167.6,1.5 R154.1@167.6,2.03
NetR182_1: R182.1 T1.3 | length 2.3
  L1 w0.125: R182.1@168.8,5.77 168.8,7.95 T1.3@168.85,8
NetR184_1: R184.1 T19.1 T20.3 | length 8.4
  L1 w0.125: T20.3@184.75,0.8 184.75,2.65 185.45,3.35 T19.1@187.05,3.35 187.05,3.95 187.3,4.2 187.6,4.2 187.9,4.5 R184.1@187.9,6.8
NetR191_2: R191.2 R192.1 T22.3 | length 3.7
  L6 w0.2: T22.3@172.9,87.15 173.95,87.15 174.3,87.5 R192.1@175.23,87.5 R191.2@175.23,86.3
NetR192_2: R192.2 T21.4 | length 3.1
  L1 w0.2: T21.4@176.695,90.4 176.7,90.395 v1(176.7,88.7)
  L6 w0.2: R192.2@176.17,87.5 176.17,88.17 v1(176.7,88.7)
NetR193_1: R193.1 T22.1 | length 1.6
  L6 w0.2: T22.1@173.85,84.85 174.35,84.85 174.77,85.27 R193.1@175.3,85.27
NetR194_2: R194.2 R195.1 | length 1
  L1 w0.3: R194.2@71.926,49.081 R195.1@71.926,50.041
NetR197_1: R197.1 R198.2 | length 1
  L1 w0.2: R198.2@78.518,89.575 R197.1@78.518,90.575
P1V1_IO: B25.1 C106.2 C107.2 IC1A.A6 IC1B.A6 IC22.10 IC22.11 IC22.12 R65.2 | length 83.9
  L1 w0.3: R65.2@52.573,87.975 51.343,87.975 50.943,87.575 50.943,84.975 51.268,84.65 IC22.10@54.443,84.65
  L1 w0.6: v1(52.1,74.5) v1(52.1,75) B25.1@52.1,77.232 v1(53.243,78.375)
  L6 w0.6: v1(52.1,75) v1(52.1,74.5) 52.1,73.4 48.3,69.6 48.3,64 52.2,60.1 52.2,29.6 57.4,24.4 v1(57.4,23.125) ; v1(53.143,79.375) 53.143,78.475 v1(53.243,78.375) 53.343,78.275 v1(53.743,78.275) v1(54.243,78.275) 57.4,75.118 v1(57.4,67.575) 57.4,67.8
  other v1: 53.143,78.875
P1V1_IO_ILIM: IC22.6 R72.2 | length 1.6
  L1 w0.2: IC22.6@58.843,86.6 58.876,86.633 58.876,87.008 59.283,87.415 R72.2@59.283,87.975
P1V1_IO_PGFB: IC22.7 R65.1 R73.2 | length 2.3
  L1 w0.2: R65.1@53.513,87.975 R73.2@54.473,87.975 54.443,87.945 IC22.7@54.443,86.6
P1V1_IO_SET: C111.2 IC22.8 R66.2 | length 2.7
  L1 w0.2: R66.2@51.843,86.245 52.823,86.245 C111.2@52.843,86.225 52.886,86.182 53.336,86.182 53.56,85.958 54.435,85.958 IC22.8@54.443,85.95
P1V1_PG: IC18.5 IC22.5 IC23.4 R54.1 T3.1 | length 89.2
  L1 w0.125: IC23.4@37.518,82.95 v1(38.705,82.95) ; T3.1@46.25,42.45 46.512,42.188 46.712,42.188 47.2,41.7 47.2,39.7 47.73,39.17 R54.1@47.73,35.5 ; IC18.5@47.893,85.925 v1(49.08,85.925) ; IC22.5@58.843,85.95 v1(60.03,85.95)
  L1 w0.2: v1(46.25,41.82) T3.1@46.25,42.45
  L6 w0.125: v1(46.25,41.82) 46.25,45.45 49.2,48.4 49.2,53.3 45,57.5 45,74.9 43.4,76.5 40.7,76.5 39.6,77.6 39.6,80.3 38.705,81.195 v1(38.705,82.95) 41.955,86.2 48.806,86.2 ; 54.806,86.2 54.5,86.2 ; v1(60.03,85.95) 59.681,86.3 54.6,86.3 54.5,86.2 ; 48.806,86.2 54.5,86.2 ; 48.806,86.2 v1(49.08,85.925) 54.225,85.925 54.5,86.2
P1V1_VDD: B21.1 C85.2 C86.2 IC1A.A1 IC1A.A2 IC1A.A3 IC1B.A1 IC1B.A2 IC1B.A3 IC18.10 IC18.11 IC18.12 R43.2 | length 86.5
  L1 w0.2: B21.1@41,79.3 42.089,79.3 42.139,79.35 v1(42.193,79.35)
  L1 w0.3: R43.2@41.623,87.95 40.393,87.95 39.993,87.55 39.993,84.95 40.318,84.625 IC18.10@43.493,84.625
  L6 w1: v1(43.293,78.25) 43.943,77.6 46.6,77.6 ; 53.3,23.8 51.6,23.8 50.6,24.8 50.6,55 46.4,59.2 46.4,77.4 46.6,77.6 ; 54.5,68.505 54.5,75 51.3,78.2 47.2,78.2 46.6,77.6
  other v1: 54.15,23.125 54.8,23.125 55.45,23.125 54.15,67.575 54.8,67.575 55.45,67.575 42.793,78.25 42.293,78.35 42.193,78.85
P1V1_VDD_ILIM: IC18.6 R47.2 | length 1.6
  L1 w0.2: IC18.6@47.893,86.575 47.926,86.608 47.926,86.983 48.333,87.39 R47.2@48.333,87.95
P1V1_VDD_PGFB: IC18.7 R43.1 R48.2 | length 2.3
  L1 w0.2: R43.1@42.563,87.95 R48.2@43.523,87.95 43.493,87.92 IC18.7@43.493,86.575
P1V1_VDD_SET: C89.2 IC18.8 R44.2 | length 2.7
  L1 w0.2: R44.2@40.893,86.22 41.873,86.22 C89.2@41.893,86.2 41.936,86.157 42.386,86.157 42.61,85.933 43.485,85.933 IC18.8@43.493,85.925
P2V5_VREF: B28.1 C155.2 C178.2 IC35.2 IC39.1 IC39.2 R142.1 | length 4.1
  L1 w0.125: B28.1@91.8,31.9 93.1,30.6 93.4,30.6 94.125,29.875 IC35.2@94.125,28.925
P3V0_REFA: B29.1 C5A.2 C116.2 IC1A.F4 IC1A.G4 IC4A.8 IC25.6 IC25.7 | length 31.9
  L1 w0.2: IC25.6@56.125,13.95 56.125,12.825 56.4,12.55 B29.1@58.5,12.55
  L1 w0.25: IC4A.8@30.65,19.425 30.65,19 v1(31,18.65)
  L3 w1: v1(31,18.65) 37.8,18.65 39.2,20.05 48.2,20.05 52,16.25 55.1,16.25 v1(55.9,17.05)
P3V0_REFB: B27.1 C5B.2 C113.2 IC1B.F4 IC1B.G4 IC4B.8 IC24.6 IC24.7 | length 31.9
  L1 w0.2: IC24.6@56.125,58.4 56.125,57.275 56.4,57 B27.1@58.5,57
  L1 w0.25: IC4B.8@30.65,63.875 30.65,63.45 v1(31,63.1)
  L3 w1: v1(31,63.1) 37.8,63.1 39.2,64.5 48.2,64.5 52,60.7 55.1,60.7 v1(55.9,61.5)
P3V3: C56.2 C57.2 C59.2 C60.2 C119.2 C120.2 C121.2 C125.2 C126.2 C129.2 C133.2 C134.2 C147.2 C150.2 C151.2 C152.2 C153.2 C162.2 C163.1 C298.2 IC9.4 IC11.8 IC12.8 IC13.8 IC26.6 IC40.14 L9.2 MOD2.33 MOD2.34 R80.2 R87.2 R88.2 R95.2 R96.2 R139.2 R140.2 | length 70.5
  L1 w0.3: v1(151.85,56.25) C57.2@152.4,56.25 ; v1(151.85,61.95) C56.2@152.4,61.95 ; IC13.8@158.2,50.395 158.2,49.6 158.25,49.55 C60.2@158.25,48.9 v1(158.25,48.35) ; IC12.8@160.9,44.795 160.8,44.695 160.8,44 160.95,43.85 C59.2@160.95,43.3 v1(160.95,42.75) ; L9.2@174.225,65.4 179.1,65.4 180.37,66.67 R140.2@180.37,68.5 R139.2@181.33,68.5 ; IC40.14@182.1,14.35 182.15,14.4 C298.2@182.15,15.8 v1(182.15,16.425)
  L1 w0.5: C57.2@152.4,56.25 153.282,56.25 153.387,56.145 154.05,56.145 IC11.8@154.1,56.095 ; C56.2@152.4,61.95 153.282,61.95 153.387,61.845 154.05,61.845 IC9.4@154.1,61.795
  L3 w0.3: MOD2.33@163.968,-0.625 165.5,0.907 165.5,9.2 167.3,11 175,11 176.4,12.4 180.5,12.4 182.15,14.05 v1(182.15,16.425)
  L6 w0.3: IC26.6@147.498,4.145 148.242,3.4 C121.2@149.036,3.4
  L6 w0.5: v1(144.55,10.95) C150.2@144.55,12 144.55,12.55 144.4,12.7 C151.2@144.4,13.15 144.42,13.13 R95.2@145.5,13.13 ; v1(144.55,28.55) C134.2@144.55,29.6 144.55,30.15 144.4,30.3 C147.2@144.4,30.75 144.42,30.73 R88.2@145.5,30.73 ; v1(152.4,5.1) v1(152.835,5.535) 153.485,5.535 C129.2@153.5,5.55 C133.2@154.5,5.55 155.49,5.55 155.53,5.51 R87.2@155.53,5.5 ; v1(152.4,22.7) v1(152.835,23.135) 153.485,23.135 C152.2@153.5,23.15 C153.2@154.5,23.15 155.49,23.15 155.53,23.11 R96.2@155.53,23.1 ; v1(152.4,40.3) v1(152.835,40.735) 153.485,40.735 C125.2@153.5,40.75 C126.2@154.5,40.75 155.49,40.75 155.53,40.71 R80.2@155.53,40.7
  other v1: 156.8,-1.2 157.4,-1.2 158,-1.2 158.7,-1.2 159.3,-1.2 159.9,-1.2 144.55,11.475 144.55,29.075 175.5,71 176.3,71 176.3,71.8 176.3,72.5
P3V3_ADC: B26.1 C109.2 C110.2 IC1A.F3 IC1A.G3 IC1B.F3 IC1B.G3 IC23.10 IC23.11 IC23.12 R71.2 | length 9.7
  L1 w0.3: B26.1@30.2,77 31.766,77 31.791,77.025 v1(31.818,77.025) ; R71.2@31.248,85.625 30.018,85.625 29.618,85.225 29.618,82.625 29.943,82.3 IC23.10@33.118,82.3
  other v1: 55.45,19.225 55.45,19.875 55.45,63.675 55.45,64.325 32.418,75.925 32.918,75.925 31.918,76.025 31.818,76.525
P3V3_ADC_ILIM: IC23.6 R76.2 | length 1.6
  L1 w0.2: IC23.6@37.518,84.25 37.551,84.283 37.551,84.658 37.958,85.065 R76.2@37.958,85.625
P3V3_ADC_PGFB: IC23.7 R71.1 R77.2 | length 2.3
  L1 w0.2: R71.1@32.188,85.625 R77.2@33.148,85.625 33.118,85.595 IC23.7@33.118,84.25
P3V3_ADC_SET: C114.2 IC23.8 R74.2 | length 2.7
  L1 w0.2: R74.2@30.518,83.895 31.498,83.895 C114.2@31.518,83.875 31.561,83.832 32.011,83.832 32.235,83.608 33.11,83.608 IC23.8@33.118,83.6
P3V3_CLK: B24.1 C31.2 C32.2 C33.2 C34.2 C35.2 C39.2 C42.2 C43.2 C44.2 C101.2 C176.2 IC7.6 IC7.10 IC7.26 IC7.28 IC7.32 IC21.1 L3.1 L11.2 R20.2 | length 17.2
  L1 w0.2: IC7.26@97.5,11.975 98.075,11.975 98.3,12.2 98.3,12.9 98.225,12.975
  L1 w0.3: v1(86.5,30) B24.1@86.5,31.4 ; v1(89.625,14.775) C31.2@90.25,14.775 C32.2@91.25,14.775 91.725,14.775 92.025,14.475 IC7.10@92.6,14.475 ; IC7.6@94.3,15.675 94.3,16.4 94.58,16.68 R20.2@94.58,19.425 v1(94.58,20.05) ; IC7.28@97.5,12.975 98.225,12.975 98.325,12.875 C44.2@98.95,12.875 C43.2@99.95,12.875 v1(100.575,12.875) ; IC7.32@97.5,14.975 97.875,14.975 98.575,15.675 C42.2@98.95,15.675 C35.2@99.95,15.675 v1(100.575,15.675)
  other v1: 75,18.8 75,19.5 75.5,20.1 85.5,29 85.8,29.8 87.2,30
P3V3_CLK_PG: IC21.3 R67.1 T8.1 | length 59.6
  L1 w0.125: T8.1@38.45,42.45 38.712,42.188 38.913,42.188 39.3,41.8 39.3,40.7 39.9,40.1 39.9,37.2 40.13,36.97 R67.1@40.13,35.5 v1(40.13,34.27) ; IC21.3@83.85,27.55 v1(83.85,28.25)
  L3 w0.125: v1(40.13,34.27) 40.13,29.57 41.3,28.4 45.9,28.4 47,29.5 82.6,29.5 v1(83.85,28.25)
P3V3_D_PG: IC17.3 R56.1 T5.1 | length 70
  L1 w0.125: T5.1@42.35,42.45 42.612,42.188 42.813,42.188 43.3,41.7 43.3,40.4 43.7,40 43.7,37.3 43.93,37.07 R56.1@43.93,35.5 v1(43.93,34.23) ; v1(77.5,34.3) 97.1,34.3 101.066,38.266 IC17.3@101.994,38.266
  L3 w0.125: v1(43.93,34.23) 43.93,34.93 44.4,35.4 76.4,35.4 v1(77.5,34.3)
P3V3_DAC: C156.2 C157.2 C175.1 C177.2 IC35.1 L11.1 OSC1.6 R123.2 R124.1 R142.2 | length 4.9
  L1 w0.2: R123.2@100.02,25.325 C156.2@101.7,25.325
  L1 w0.3: v1(95.325,21.495) R124.1@95.95,21.495 ; C156.2@101.7,25.325 v1(101.7,25.95)
  L1 w0.5: C156.2@101.7,25.325 101.7,23.715 OSC1.6@101.95,23.465
  other v1: 88.2,26.3 88.8,26.3 89.4,26.3
P3V3_DIOT: C1.2 C174.1 C180.2 D22.2 IC38.5 IC41.2 IC41.14 IC42.8 R155.2 R160.2 R165.1 R178.1 R180.1 R181.1 R184.2 R185.1 | length 11.5
  L1 w0.2: R155.2@166.3,3.9 v1(166.3,4.65) ; v1(171.75,11.7) R185.1@172.5,11.7 ; R165.1@176.2,8.4 v1(176.2,9.15) ; R178.1@177.8,8.4 v1(177.8,9.15) ; IC41.2@177.9,-1.2 v1(177.9,-0.2) ; R160.2@179.4,8.4 v1(179.4,9.15) ; R180.1@182.8,0.7 v1(182.8,1.45) ; R184.2@187.9,8.4 v1(187.9,9.15)
  L1 w0.3: v1(168.8,1.505) R181.1@168.8,2.13 ; IC42.8@174.005,-0.3 174.05,-0.345 C180.2@174.05,-2 v1(174.675,-2) ; v1(175.175,5.15) 176.35,5.15 176.9,4.6 IC41.14@177.25,4.6
  other v1: 188.8,12.5 188.8,13.2
P3V3_ISO: B20.1 C58.2 C81.2 C117.2 C118.2 C122.2 C123.2 C124.2 C127.2 C128.2 C148.2 C149.2 IC10.6 IC10.16 IC17.1 IC27.6 IC28.6 IC29.6 IC33.6 IC34.6 J1A.1 J1B.1 MOD1.33 MOD1.34 R49.2 R50.2 R51.2 R52.2 R54.2 R55.2 R56.2 R57.2 R61.2 R62.2 R63.2 R64.2 R67.2 R68.2 R69.2 R70.2 R79.2 | length 311.1
  L1 w0.2: v1(35.37,34.87) R70.2@35.37,35.5 ; R64.2@37.2,48.77 v1(37.2,49.4) ; v1(37.27,34.87) R69.2@37.27,35.5 ; R63.2@38.7,48.77 v1(38.7,49.4) ; v1(39.17,34.87) R68.2@39.17,35.5 ; R62.2@40.2,48.77 v1(40.2,49.4) ; v1(41.07,34.87) R67.2@41.07,35.5 ; R61.2@41.7,48.77 v1(41.7,49.4) ; v1(42.97,34.87) R57.2@42.97,35.5 ; R52.2@43.2,48.77 v1(43.2,49.4) ; R51.2@44.7,48.77 v1(44.7,49.4) ; v1(44.87,34.87) R56.2@44.87,35.5 ; R50.2@46.2,48.77 v1(46.2,49.4) ; v1(46.77,34.87) R55.2@46.77,35.5 ; R49.2@47.7,48.77 v1(47.7,49.4) ; v1(48.67,34.87) R54.2@48.67,35.5
  L1 w0.3: v1(105.025,10.525) IC10.6@105.025,11.65 ; v1(107.675,3.95) C58.2@108.3,3.95 108.275,3.975 IC10.16@108.275,5.75 ; C117.2@108.668,39.775 108.7,39.807 B20.1@108.7,42.3 ; v1(118.782,10.563) C123.2@118.782,11.188 C122.2@119.782,11.188 ; v1(119.157,10.108) R79.2@119.782,10.108
  L6 w0.3: 32.8,34.8 32.87,34.87 v1(35.37,34.87) v1(37.27,34.87) v1(39.17,34.87) v1(41.07,34.87) v1(42.97,34.87) v1(44.87,34.87) v1(46.77,34.87) v1(48.67,34.87) ; 105,5.7 105.025,5.725 v1(105.025,10.525) ; 107.6,5.7 107.675,5.625 v1(107.675,3.95) ; 116,10.6 116.037,10.563 v1(118.782,10.563) 119.138,10.207 119.138,10.127 v1(119.157,10.108) ; 116,11.5 116.1,11.4 119.2,11.4 119.45,11.15 C127.2@127.2,11.15 127.994,11.15 128.738,10.405 IC28.6@128.768,10.405 ; 116,19.9 116.05,19.95 C148.2@120.5,19.95 121.294,19.95 122.038,19.205 IC33.6@122.068,19.205 ; 116,28.7 116.05,28.75 C149.2@127.2,28.75 127.994,28.75 128.738,28.005 IC34.6@128.768,28.005 ; 116,37.6 116.05,37.55 C128.2@120.5,37.55 121.294,37.55 122.038,36.805 IC29.6@122.068,36.805 ; 116,39.3 117.5,39.3 122.4,44.2 125.05,44.2 C124.2@127.2,46.35 127.994,46.35 128.738,45.605 IC27.6@128.768,45.605
  L6 w0.7: 109.425,5.7 110.531,5.7 110.546,5.715 114.515,5.715 115.4,6.6
  L6 w1: J1A.1@30.512,9.458 34.042,9.458 37,6.5 56.7,6.5 59.55,9.35 ; J1B.1@30.512,53.908 33.992,53.908 35.5,52.4 35.5,49.4 ; v1(47.7,49.4) v1(46.2,49.4) v1(44.7,49.4) v1(43.2,49.4) v1(41.7,49.4) v1(40.2,49.4) v1(38.7,49.4) v1(37.2,49.4) 35.5,49.4 ; 109.425,5.7 107.6,5.7 105,5.7 103.2,3.9 88.9,3.9 86.4,6.4 62.5,6.4 59.55,9.35 ; MOD1.33@111.068,40.015 MOD1.34@113.608,40.015 115.285,40.015 116,39.3 116,37.6 116,28.7 116,19.9 116,11.5 116,10.6 116,7.2 115.4,6.6 ; 35.5,49.4 32.8,46.7 32.8,34.8 32.8,34 35.2,31.6 44.1,31.6 46.3,29.4 46.3,14.9 47.7,13.5 55.4,13.5 59.55,9.35
P3V3_MP: C169.2 C219.2 C306.2 D22.1 IC37.8 IC43.4 IC44.8 J8.30 R132.2 R134.2 | length 220.3
  L1 w0.2: v1(-2.8,13.5) R132.2@-2.8,14.23 ; R134.2@184.3,10.5 v1(184.3,11.25)
  L1 w0.3: v1(183.975,16.15) C169.2@184.6,16.15 185.175,16.15 185.526,15.799 185.95,15.799 186.025,15.724 IC37.8@186.025,15.3 ; IC44.8@205.2,20.505 205.35,20.655 205.855,20.655 206.2,21 v1(207.525,21) ; IC43.4@209.8,16.65 209.85,16.6 C306.2@209.85,15.2 v1(209.85,14.575)
  L3 w0.15: v1(-2.8,13.5) -2.8,12.4 -1.8,11.4 -1.8,8.6 6.7,0.1 6.7,-0.9 7.2,-1.4 14.346,-1.4 16.446,-3.5 70.3,-3.5 71.3,-4.5 142.2,-4.5 143.1,-3.6 144.4,-3.6 182.4,-3.6 183.4,-2.6 183.4,7.3 184.3,8.2 v1(184.3,11.25)
  other v1: 193.3,15.9 193.9,15.9
P3V3_MP2: C220.2 C307.2 IC45.4 IC46.8 J9.30 | length 47.1
  L1 w0.3: IC46.8@205.2,26.105 205.35,26.255 205.855,26.255 206.2,26.6 C220.2@206.9,26.6 v1(207.525,26.6) ; IC45.4@209.8,22.35 209.85,22.3 C307.2@209.85,20.9 v1(209.85,20.275)
  L4 w0.5: J9.30@175.557,20.987 186.087,20.987 189.828,24.728 198.028,24.728 200.3,27 204.3,27 204.7,26.6 v1(207.525,26.6) 208.5,26.6 209.85,25.25 v1(209.85,20.275)
P3V3_VCCO: B22.1 C48.2 C49.2 C88.2 IC7.16 IC7.17 IC19.1 L2.2 L4.2 L5.2 L6.2 | length 4.7
  L1 w0.3: v1(87.875,7.865) L6.2@88.5,7.865 ; v1(87.875,10.785) L5.2@88.5,10.785 ; v1(87.875,11.765) L4.2@88.5,11.765 ; v1(87.875,14.685) L2.2@88.5,14.685
  L1 w0.6: B22.1@90.7,5.9 C88.2@92.9,5.9
  other v1: 92.1,6.8 92.6,7.2
P3V3_VCCO_PG: IC19.3 R57.1 T6.1 | length 82.8
  L1 w0.125: R57.1@42.03,35.5 42.257,35.728 42.257,35.758 42.7,36.2 43.1,36.2 43.3,36.4 43.3,38.1 42.55,38.85 T6.1@42.45,38.85 ; v1(86,7.5) 90.35,3.15 IC19.3@94.2,3.15
  L1 w0.2: v1(42.35,38.22) T6.1@42.35,38.85
  L6 w0.125: v1(42.35,38.22) 43.28,38.22 45.8,35.7 48.8,35.7 49.2,35.3 49.2,16 50.4,14.8 57.1,14.8 64.4,7.5 v1(86,7.5)
P5V0: B19.1 C6A.2 C6B.2 C7A.2 C7B.2 C8A.2 C8B.2 C10A.2 C10B.2 C16A.2 C16B.2 C17A.2 C17B.2 C18A.2 C18B.2 C76.1 C79.2 IC2A.6 IC2B.6 IC3A.7 IC3B.7 IC4A.6 IC4A.7 IC4B.6 IC4B.7 IC5A.7 IC5B.7 IC6A.6 IC6B.6 L7.2 R14A.2 R14B.2 | length 10.1
  L1 w0.2: v1(28.6,16.63) R14A.2@28.6,17.18 ; v1(28.6,61.08) R14B.2@28.6,61.63 ; v1(29.85,17) C10A.2@29.85,17.55 ; v1(29.85,61.45) C10B.2@29.85,62
  L1 w0.25: B19.1@17.1,74.2 18.872,74.2 18.934,74.137 v1(18.975,74.137) ; IC4A.6@29.65,19.425 29.65,18.8 29.9,18.55 ; IC4B.6@29.65,63.875 29.65,63.25 29.9,63 ; C10A.2@29.95,17.55 29.9,17.6 29.9,18.55 ; C10B.2@29.95,62 29.9,62.05 29.9,63 ; IC4A.7@30.15,19.425 30.15,18.8 29.9,18.55 ; IC4B.7@30.15,63.875 30.15,63.25 29.9,63
  other v1: 22.386,14.887 21.686,15.587 22.386,15.587 48.4,16.658 48.4,17.158 48.4,17.658 22.386,21.587 21.686,22.287 22.386,22.287 48.4,27.658 48.4,28.158 48.4,28.658 22.386,59.337 21.686,60.037 22.386,60.037 48.4,61.108 48.4,61.608 48.4,62.108 22.386,66.037 21.686,66.737 22.386,66.737 48.4,72.108 48.4,72.608 48.4,73.108 18.975,74.837 18.975,75.537 19.675,75.537
P5V0_ILIM: IC16.6 R41.2 | length 1.6
  L1 w0.2: IC16.6@25.575,85.587 25.608,85.62 25.608,85.995 26.015,86.402 R41.2@26.015,86.962
P5V0_PG: R68.1 T9.1 | length 4.5
  L1 w0.125: R68.1@38.23,35.5 38.457,35.728 38.457,35.758 38.9,36.2 39.1,36.2 39.4,36.5 39.4,38.1 38.913,38.588 38.712,38.588 T9.1@38.45,38.85
P5V0_PGFB: IC16.7 R38.1 R42.2 | length 2.3
  L1 w0.2: R38.1@20.245,86.962 R42.2@21.205,86.962 21.175,86.932 IC16.7@21.175,85.587
P5V0_SET: C84.2 IC16.8 R39.2 R40.2 | length 3.7
  L1 w0.2: R39.2@17.575,85.232 R40.2@18.575,85.232 19.555,85.232 C84.2@19.575,85.212 19.618,85.17 20.068,85.17 20.292,84.945 21.167,84.945 IC16.8@21.175,84.937
P6V0: B13.1 C71.2 C72.2 C73.2 C74.2 C75.2 C80.2 C83.2 C87.2 C90.1 C91.1 C97.2 C104.2 C105.2 C112.2 C115.2 IC16.1 IC16.2 IC16.3 IC16.4 IC17.4 IC17.6 IC18.1 IC18.2 IC18.3 IC19.6 IC21.6 IC22.1 IC22.2 IC22.3 IC23.1 IC23.2 IC23.3 IC24.2 IC25.2 Tr1.4 Tr1.5 | length 37.8
  L1 w1: Tr1.4@97.282,57.823 97.282,57.718 98.1,56.9 98.1,56.721 Tr1.5@99.173,55.648
  L6 w1: v1(73.3,67.5) v1(73.3,66.8) v1(73.3,66.1) v1(73.3,65.4) v1(73.3,64.7) v1(73.3,64) 73.3,62.5 79.1,56.7 93.912,56.7 95.035,57.823 Tr1.4@97.282,57.823 97.282,57.718 98.1,56.9 98.1,56.721 Tr1.5@99.173,55.648
  other v1: 98.4,5.5 98.4,6.1 55,7.45 55.6,7.45 55,8.05 86.2,23.35 86.8,23.35 106,34.6 105.6,35.2 106.3,35.2 55,51.9 55.6,51.9 55,52.5 26.3,76.2 26.3,76.9 26.3,77.6 26.3,78.3 37.418,78.525 37.918,78.525 38.418,78.525 26.3,79 38.518,79.025 38.518,79.525 47.793,80.85 48.293,80.85 48.793,80.85 58.743,80.875 59.243,80.875 59.743,80.875 48.893,81.35 59.843,81.375 48.893,81.85 59.843,81.875
P12V0_DIOT: C173.2 IC38.1 IC38.3 J6.A1 J6.D1 J6.E1 J6.G1 J6.H1 J6.J1 J6.K1 R257.1 R260.1 R261.1 R262.1 | length 8.4
  L1 w0.2: IC38.1@191.35,8.3 191.35,9.35 191.7,9.7 192.9,9.7 193.25,9.35 IC38.3@193.25,8.3
  L1 w0.6: IC38.1@191.35,8.3 191.35,6.65 C173.2@191.3,6.6 191.3,5.851 191.651,5.5 v1(192.2,5.5) v1(192.8,5.5)
P12V0_EEM: C164.2 C165.2 C170.2 C171.2 D21.1 FL1.2 IC36.1 J8.28 J8.29 J9.28 J9.29 R128.1 R141.2 R191.1 R257.2 R260.2 R261.2 R262.2 T21.1 T21.2 T21.3 | length 212.4
  L1 w0.2: v1(-2.8,8) R141.2@-2.8,8.73 ; v1(179.7,75.9) R128.1@180.35,75.9
  L4 w0.15: v1(-2.8,8) -2.4,8 5.5,0.1 5.5,-2.2 6.1,-2.8 13.766,-2.8 15.566,-4.6 144.3,-4.6 144.5,-4.4 185.9,-4.4 189.1,-1.2 189.1,5 v1(189.8,5.7)
  L6 w0.2: R191.1@176.17,86.3 176.9,86.3 178.2,87.6 v1(178.2,89)
  other v1: 183.7,79.2 181.5,80.4 182.2,80.4 182.9,80.4 182.1,88.9 182.7,88.9 183.3,88.9 183.9,88.9
P12V0_LLC: C130.1 C131.1 C168.2 L10.4 R101.2 T7.7 T7.8
  other v1: 161.3,83.2 162,83.2 162.7,83.2 161.3,83.9 162,83.9 162.7,83.9 130.8,85.7 131.3,86.2 130.8,86.7 131.3,87.2 130.8,87.7 131.3,88.2
P15V0: B14.1 C63.2 C64.2 C183A.1 C183B.1 IC14.10 IC14.11 IC14.12 J1A.14 J1B.14 R194.1 | length 103.9
  L1 w0.2: v1(81.626,50.311) 81.68,50.311 81.725,50.357 B14.1@83.118,50.357
  L1 w0.3: R194.1@72.06,47.99 71.92,48.13 R194.1@71.9,48.13 71.9,47.7 72.2,47.4 74.8,47.4 75.225,47.825 IC14.10@75.225,51
  L3 w0.54: 14.002,8.607 14.002,10.31
  L3 w1: 14.002,8.607 14.002,8.498 14.023,8.477 14.023,8.167 J1A.14@15.272,6.918 ; 14.002,10.702 14.002,47.102 15.272,48.372 ; J1B.14@15.272,51.368 15.272,48.372 ; v1(56.6,42.4) v1(55.95,42.4) v1(55.3,42.4) 53.6,44.1 19.544,44.1 15.272,48.372
  L6 w1: J1A.14@15.272,6.918 15.389,6.802 15.389,5.711 16.1,5 16.425,5 16.5,4.925 C183A.1@16.5,4.6 ; J1B.14@15.272,51.368 15.389,51.252 15.389,50.161 16.1,49.45 16.425,49.45 16.5,49.375 C183B.1@16.5,49.05
  other v1: 80.526,49.711 81.026,49.711 81.526,49.811 81.626,50.811
P15V0_LNA_ILIM: IC14.6 R33.2 | length 1.6
  L1 w0.2: R33.2@71.926,55.851 72.486,55.851 72.893,55.444 73.268,55.444 IC14.6@73.301,55.411
P15V0_LNA_PG: IC14.5 R69.1 T10.1 | length 69.6
  L1 w0.125: T10.1@34.55,42.45 34.812,42.188 35.013,42.188 35.4,41.8 35.4,40.4 36,39.8 36,36.9 v1(36.33,36.57) R69.1@36.33,35.5 ; v1(73.6,38.8) 73.6,44.3 70.8,47.1 70.8,56.5 71.4,57.1 73.4,57.1 73.951,56.549 IC14.5@73.951,55.411
  L3 w0.125: v1(36.33,36.57) 71.37,36.57 v1(73.6,38.8)
P15V0_LNA_SET: C65.2 IC14.8 R32.2 | length 2.7
  L1 w0.2: R32.2@73.656,48.411 73.656,49.391 73.676,49.411 73.719,49.454 73.719,49.904 73.943,50.129 73.943,51.004 IC14.8@73.951,51.011
P15V0_PGFB: IC14.7 R195.2 R196.2 | length 2.3
  L1 w0.3: R196.2@71.926,51.941 71.926,50.981 73.271,50.981 IC14.7@73.301,51.011
P18V0: B12.1 C61.2 C62.2 C73.1 C74.1 C146.2 D2.1 D3.1 IC14.1 IC14.2 IC14.3 R114.1 R116.2 | length 50.5
  L1 w0.3: C61.2@80.1,55.8 90.2,55.8 100.5,45.5 116.5,45.5 117.975,46.975 C146.2@120.468,46.975 120.468,48.168 120.844,48.544 121.537,48.544 R116.2@121.568,48.575 121.568,49.668 121.9,50 122.993,50 R114.1@123.068,50.075
PE_CLK.CLK_N: J6.F4
PE_CLK.CLK_P: J6.E4
PGOOD: IC36.7 R140.1 R155.1 T2.1 T18.1 | length 96.2
  L1 w0.125: R155.1@166.3,2.3 v1(166.3,1.1) 166.3,-0.1 166.45,-0.25 T2.1@166.45,-1.65
  L1 w0.2: v1(176.95,80.35) IC36.7@177.5,80.35 ; v1(178.55,72.65) T18.1@178.55,71.95 178.55,71.35 179.43,70.47 R140.1@179.43,68.5
  L6 w0.2: v1(166.3,1.1) 167.2,1.1 169.7,3.6 169.7,5 167.8,6.9 167.8,58.9 177.8,68.9 177.8,70.7 178.55,71.45 v1(178.55,72.65) 178.55,74.7 177.75,75.5 177.75,78.85 176.95,79.65 v1(176.95,80.35)
PSU_EN: IC36.8 R134.1 R135.2 R182.2 R193.2 | length 112.5
  L1 w0.125: v1(168.8,4.1) R182.2@168.8,4.83
  L1 w0.2: v1(176.95,77.45) IC36.8@177.5,77.45 ; v1(183.83,13.33) R135.2@184.58,13.33 ; R134.1@184.3,12.1 184.3,13.023 184.39,13.113 184.39,13.14 R135.2@184.58,13.33 ; R135.2@184.6,13.33 R135.2@184.58,13.33
  L3 w0.125: v1(168.8,4.1) 173.3,4.1 173.9,3.5 177,3.5 178.2,4.7 180.7,4.7 181.9,5.9 181.9,12.1 183.13,13.33 v1(183.83,13.33)
  L6 w0.125: v1(168.8,4.1) 166.6,6.3 166.6,59.8 176.95,70.15 v1(176.95,77.45) 176.95,78.55 175.3,80.2 R193.2@175.3,84.33
RST: IC42.3 T1.1 | length 2.1
  L1 w0.125: T1.1@171.15,7.05 171.15,6.45 171.465,6.135 IC42.3@171.465,5.1
RSTn: D25.1 R133.1 T20.1 | length 26.3
  L1 w0.125: D25.1@174.25,7 174.25,6.9 174.7,6.45 174.7,2.2 174.8,2.1 v1(179.9,2.1) ; v1(185.8,-0.2) 187,-0.2 T20.1@187.05,-0.15 187.05,0.45 188.1,1.5 189.4,1.5 190.1,2.2 190.1,4.2 190.4,4.5 R133.1@191.13,4.5
  L6 w0.125: v1(179.9,2.1) 179.9,1.3 180.9,0.3 181.4,0.3 181.9,-0.2 v1(185.8,-0.2)
SERVMOD_3V3: IC40.5 IC40.6 IC40.12 IC40.13 R138.1 R153.2 | length 55.5
  L1 w0.125: R153.2@167.6,4.87 167.62,4.87 167.847,4.643 167.847,4.623 168.2,4.27 168.2,1.2 168.6,0.8 170.5,0.8 171.4,1.7 v1(180.9,1.7) ; IC40.6@176.3,11.1 177.3,11.1 ; IC40.5@176.3,11.75 177.3,11.75 177.4,11.65 ; v1(178.3,11.8) 177.55,11.8 177.4,11.65 ; v1(178.4,10.4) 177.6,10.4 177.3,10.7 177.3,11.1 ; v1(178.8,13.8) 179.4,13.8 179.5,13.7 180.9,13.7 181,13.6 ; IC40.12@182.1,13.05 181.1,13.05 181,13.15 181,13.6 ; IC40.13@182.1,13.7 181.1,13.7 181,13.6 ; v1(185.7,2) 186.3,2.6 189.2,2.6 189.6,3 189.6,4.5 190.1,5 192.63,5 192.883,4.747 192.903,4.747 193.13,4.52 R138.1@193.13,4.5 ; 177.3,11.1 177.4,11.2 177.4,11.65
  L6 w0.125: v1(178.3,11.8) 178.3,13.3 v1(178.8,13.8) ; v1(178.4,10.4) 178.4,9.1 180.9,6.6 v1(180.9,1.7) 180.9,1 181.3,0.6 184.3,0.6 v1(185.7,2)
STRIP1: C2.1 M1.1 M2.1 R31.1 R122.2 | length 92.9
  L4 w1: M2.1@0,0 -0.3,0.3 -0.3,3.7 -4.8,8.2 -4.8,12.9 -3.9,13.8 -3.9,82.6 -2.1,84.4 -2.1,85.814 0,87.914 M1.1@0,88.9
STRIP2: R36.1
  other v1: 65.9,-2.7
STRIP3: R122.1 | length 108.3
  L1 w0.5: R122.1@36.85,-1.6 37.1,-1.85 37.1,-2.107 37.393,-2.4 v1(38.3,-2.4)
  L4 w0.2: v1(38.3,-2.4) 40.1,-4.2 v1(143.9,-4.2)
  other v1: 214.7,-3.8
Switch_I2C.SCL: IC40.2 IC40.9 R187.2 | length 25.7
  L1 w0.125: IC40.2@176.3,13.7 v1(177.8,13.7) ; v1(177.8,11.1) IC40.9@182.1,11.1
  L6 w0.125: v1(177.8,13.7) v1(177.8,11.1) 178.9,11.1 182,8 186.6,8 188,6.6 188,2.3 188.2,2.1 R187.2@188.83,2.1
Switch_I2C.SDA: IC40.3 IC40.10 R186.2 | length 22.6
  L1 w0.125: IC40.3@176.3,13.05 v1(179.05,13.05) ; v1(179.05,11.75) IC40.10@182.1,11.75
  L6 w0.125: v1(179.05,13.05) v1(179.05,11.75) 182.2,8.6 187,8.6 188.83,6.77 R186.2@188.83,3.1